# Altium PCB PCB1_21_02_dongho.PcbDoc
Units mil, origin at the board's own origin, x right, y up, seen from the top; angles counter-clockwise.
Board outline 1850 x 2600 mil, 2 copper layers (Top Layer, Bottom Layer); 6 components, 18 nets, 65 pads, 0 vias.
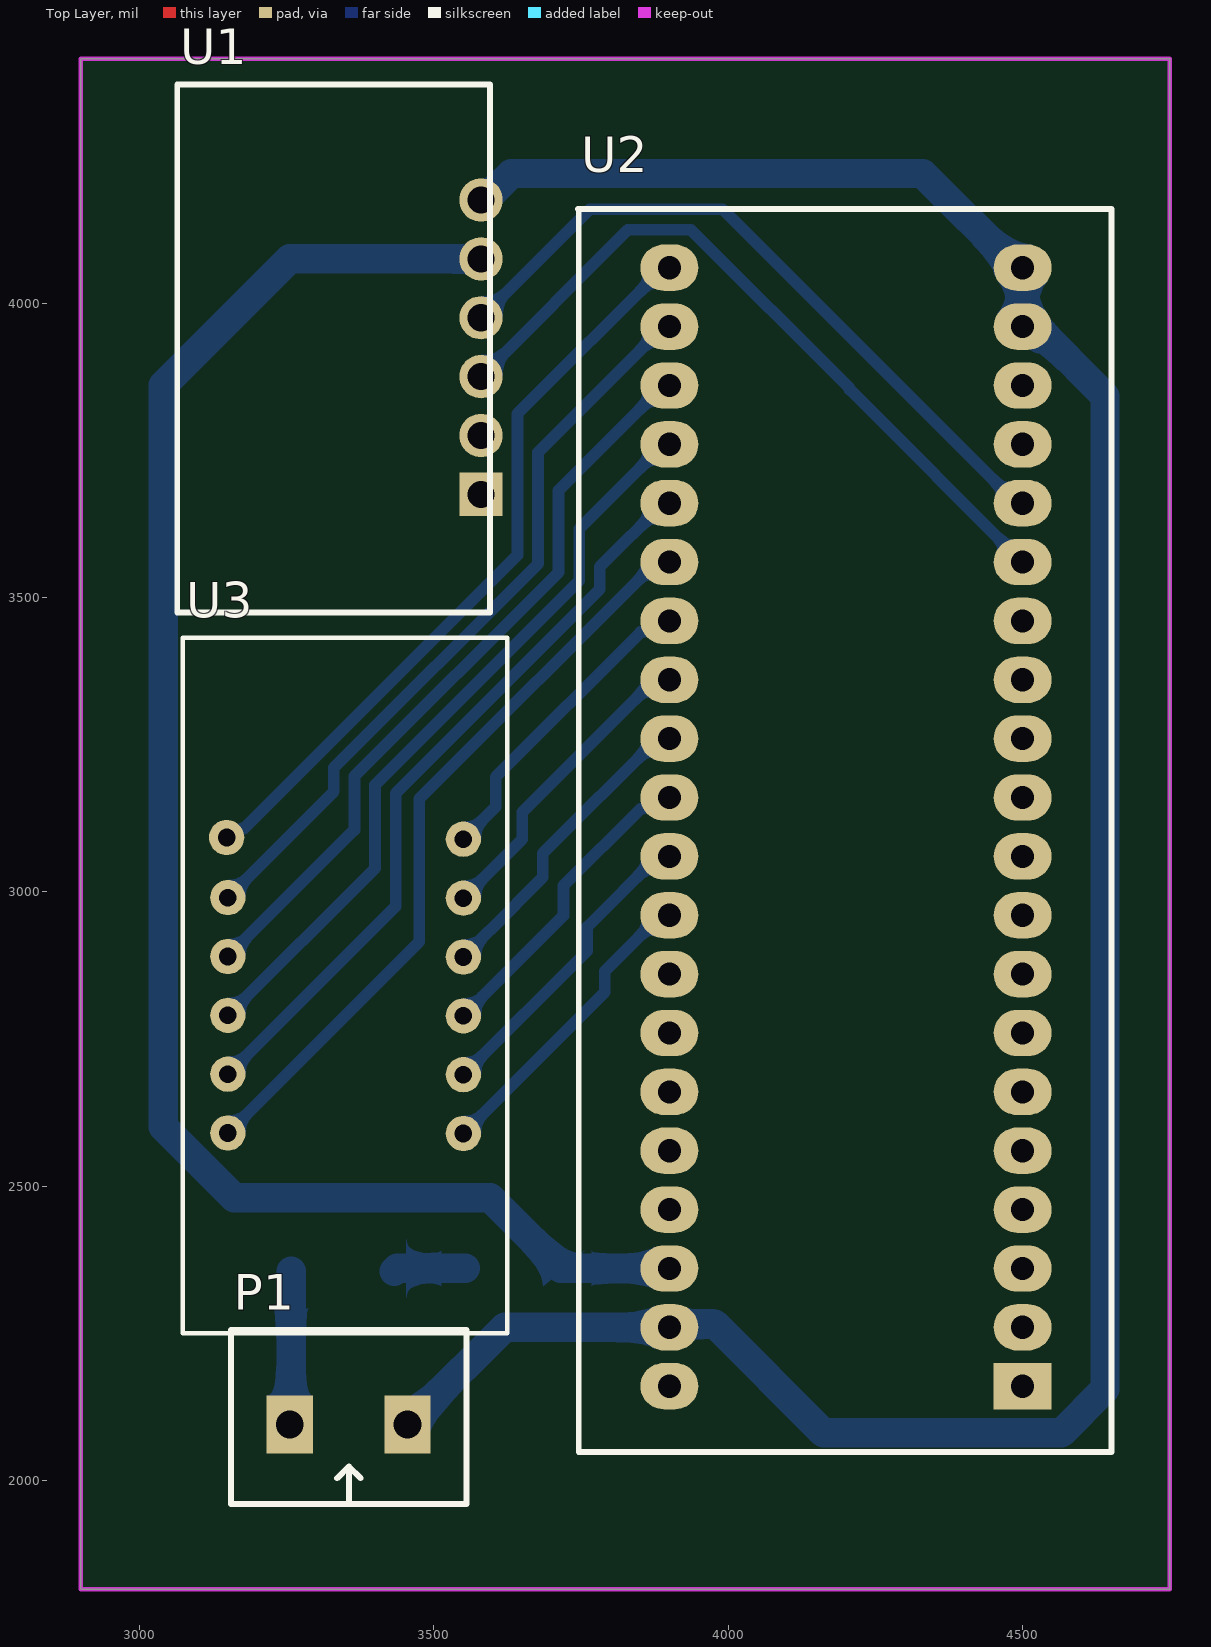
[diagram p0: Top Layer view]
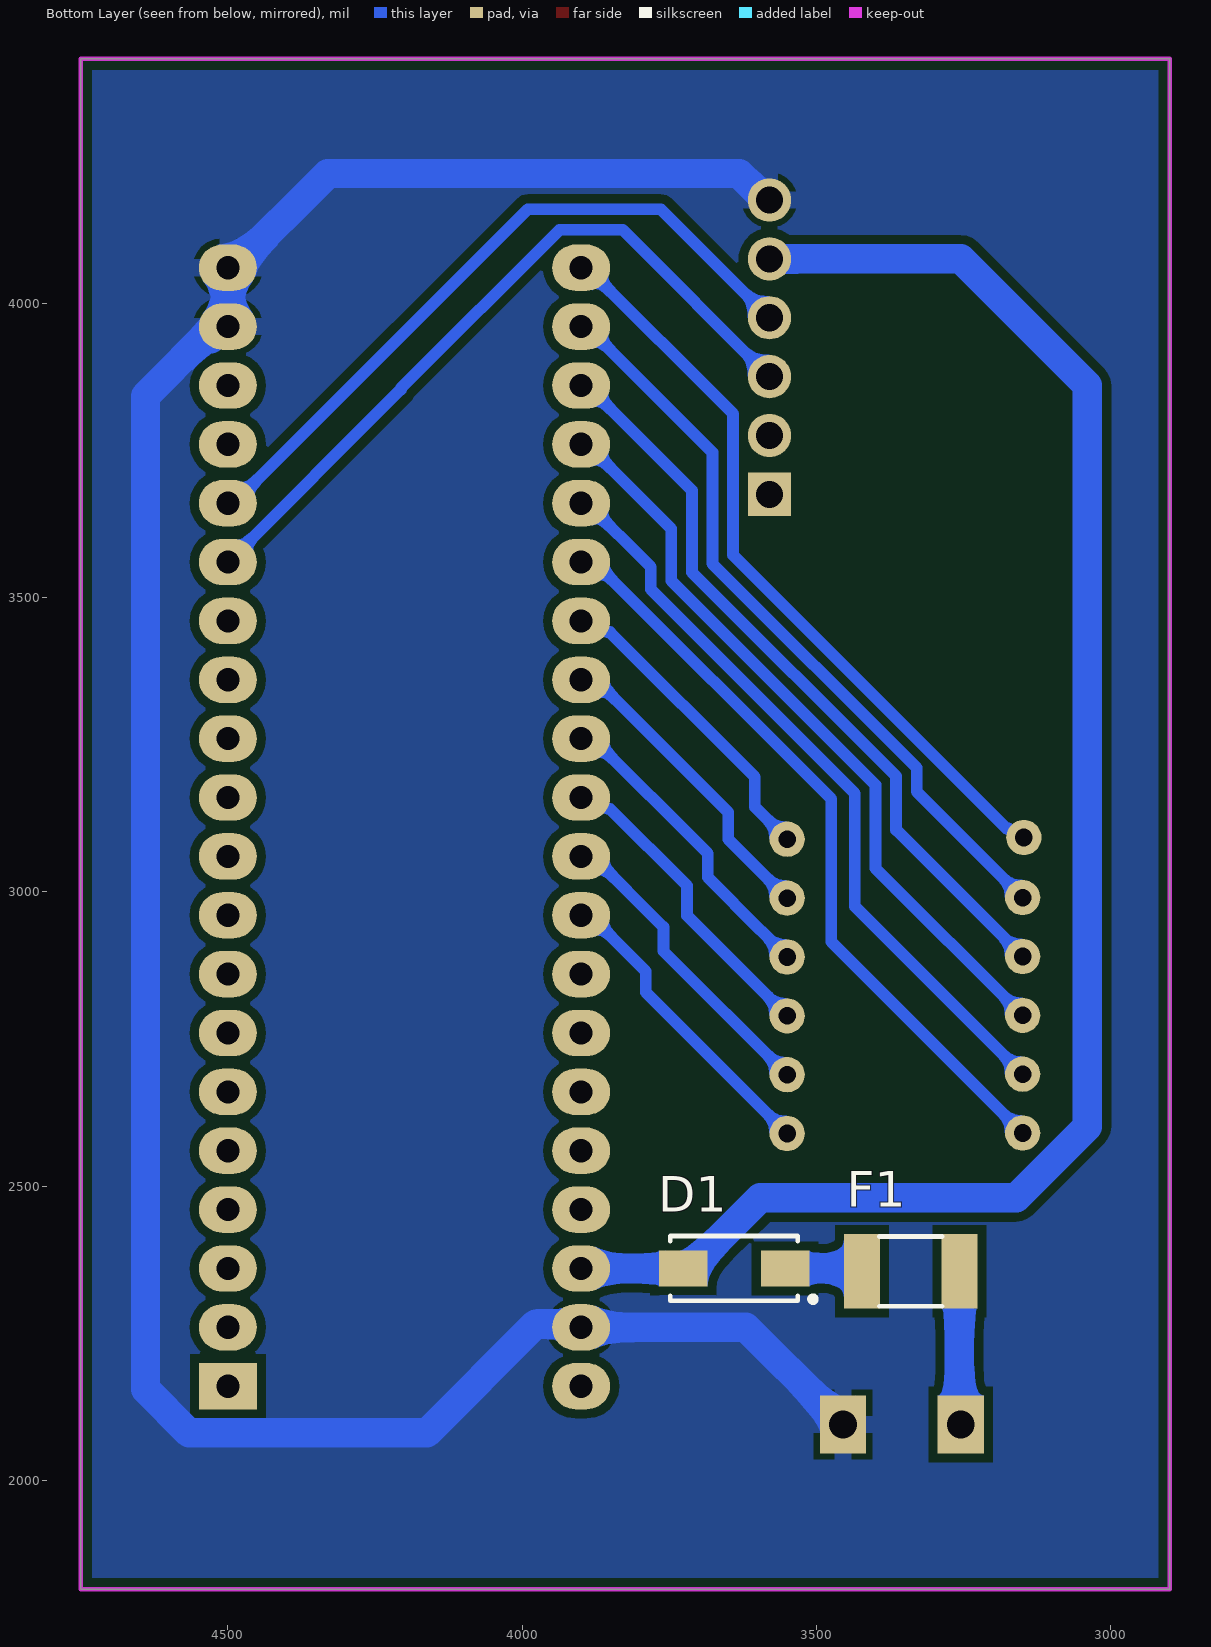
[diagram p1: Bottom Layer view, seen from below]
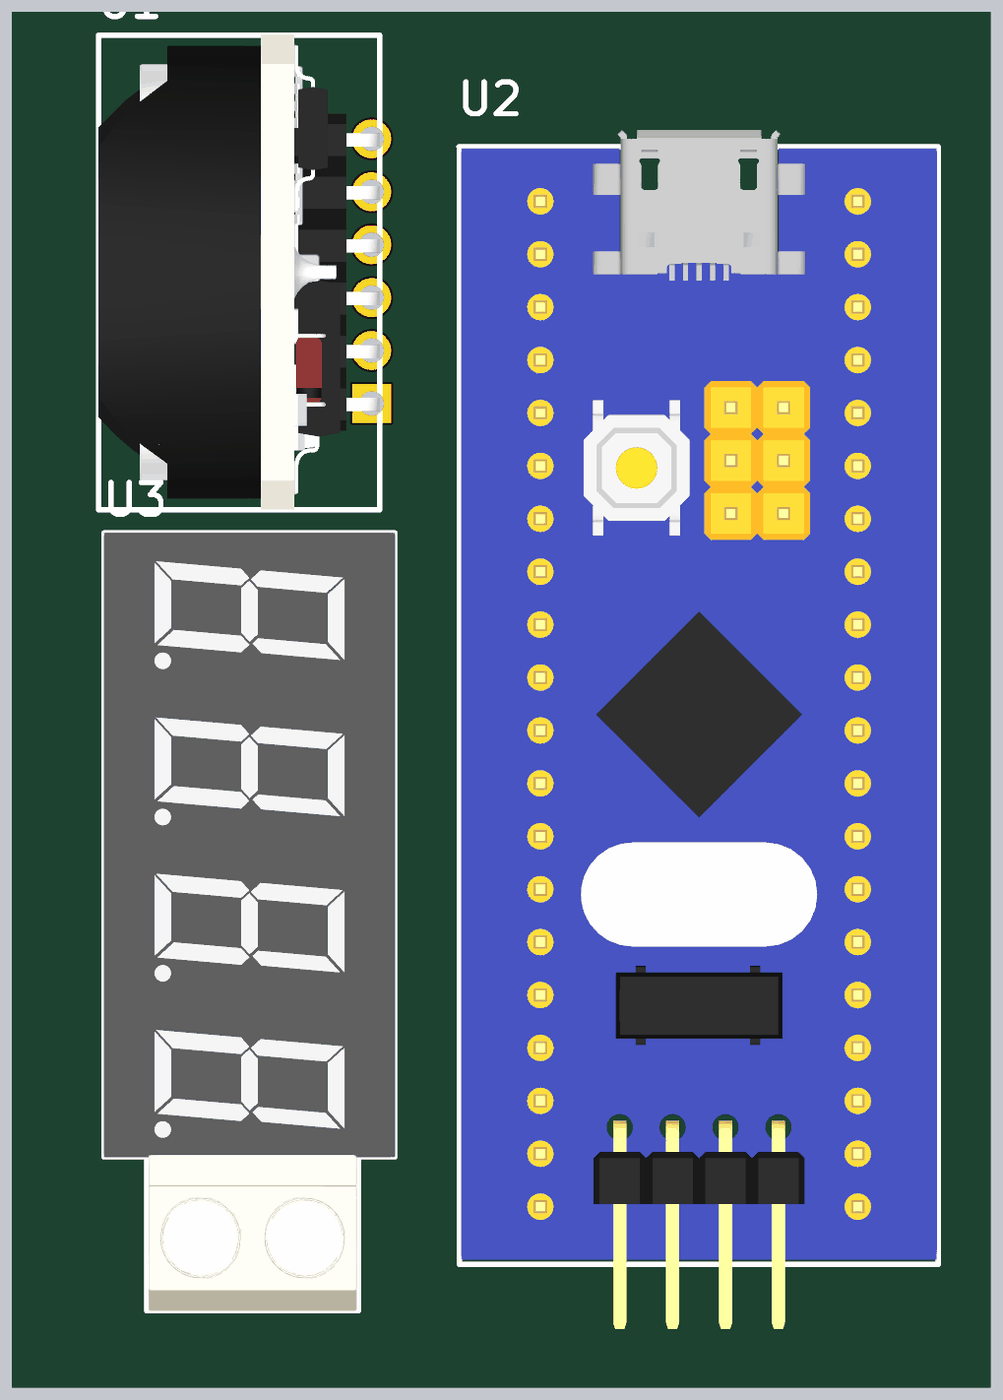
[diagram p2: 3D render of the assembled board from above, using the file's embedded part models]

## Layer stack, top to bottom
Top Solder: solder mask 0.4, Solder Resist, Dk 3.5
Top Layer: signal copper 1.4
Dielectric 1: dielectric 12.6, FR-4, Dk 4.8
Bottom Layer: signal copper 1.4
Bottom Solder: solder mask 0.4, Solder Resist, Dk 3.5

## Board outline
2900,1815 2900,4415 4750,4415 4750,1815

## Design rules (kind name [scope] priority, off if disabled: settings)
Clearance [All] p1: gap=15 ignorepadtopadclearanceinfootprint=FALSE except(0: Arc-Hole Track-Hole SMDPad-Hole THPad-Hole Via-Hole Fill-Hole Poly-Hole Region-Hole Text-Hole)
PolygonConnect [All] p1: connectstyle=Relief reliefconductorwidth=30 reliefentries=4 polygonreliefangle="90 Angle" airgapwidth=10
RoutingVias [All] p1: holewidth=31.5 width=59.06 viastyle="Through Hole" minholewidth=31.5 minwidth=59.06 maxholewidth=31.5 maxwidth=59.06
SolderMaskExpansion [All] p1: expansion=4 istentingtop=FALSE
Width [All] p1: maxlimit=50 minlimit=20 preferedwidth=30 minimp=50.000000 maximp=50.000000 favimp=50.000000
30 further rules are at their usual default settings.

## Components (designator, comment, footprint, x,y, rotation, side; value= is the part's Value field where it differs from the comment)
D1 "D Schottky" SS34 3640,2360 r0 bottom
F1 "Fuse" "FUSE SMD" 3340,2355 r0 bottom
P1 "Domino 2" "DOMINO 2- 5mm" 3355,2095 r180 top
U1 "Module DS3231" "Module DS3231( Part A )" 3694,3925 r90 top
U2 "Bluepill" "Blue Pill" 3900,2160 r0 top
U3 "4Digit 7Segment" "4 digit 7 segment" 3147.93,3092.2 r270 top

## Footprints (in the part's own frame and the unit in brackets; to place one, negate y for a bottom-side part, rotate by r counter-clockwise, add the part's x,y. Pads: shape width x height; smd on the part's side, far side on the other; paste and mask are expansions set on the pad)
"4 digit 7 segment" [mil]
  round 60 hole 30: 1(0,0) 2(102.2,2.07) 3(202.2,2.07) 4(302.2,2.07) 5(402.2,2.07) 6(502.2,2.07) 7(503.08,402.08) 8(403.08,402.08) 9(303.08,402.08) 10(203.08,402.08) 11(103.08,402.08) 12(3.08,402.08) 12(3.08,402.08)
  silkscreen extent -339,-75 842,477, body extent -339,-75 842,477, height 181
"Blue Pill" [mm]
  oval 2.5x2 hole 1: 1(0,48.26) 2(0,45.72) 3(0,43.18) 4(0,40.64) 5(0,38.1) 6(0,35.56) 7(0,33.02) 8(0,30.48) 9(0,27.94) 10(0,25.4) 11(0,22.86) 12(0,20.32) 13(0,17.78) 14(0,15.24) 15(0,12.7) 16(0,10.16) 17(0,7.62) 18(0,5.08) 19(0,2.54) 20(0,0) 22(15.24,2.54) 23(15.24,5.08) 24(15.24,7.62) 25(15.24,10.16) 26(15.24,12.7) 27(15.24,15.24) 28(15.24,17.78) 29(15.24,20.32) 30(15.24,22.86) 31(15.24,25.4) 32(15.24,27.94) 33(15.24,30.48) 34(15.24,33.02) 35(15.24,35.56) 36(15.24,38.1) 37(15.24,40.64) 38(15.24,43.18) 39(15.24,45.72) 40(15.24,48.26)
  rect 2.5x2 hole 1: 21(15.24,0)
  silkscreen extent -3.94,-2.84 19.08,50.8, body extent -3.84,-5.95 19.02,51.61, height 12.31
"DOMINO 2- 5mm" [mm]
  rect 2x2.5 hole 1.2: 1(-2.54,0) 2(2.54,0)
  silkscreen extent -5.08,-4.08 5.08,3.43, body extent -5,-4.07 5,3.43, height 10
"FUSE SMD" [mm] "SMD FUSE"
  rect 1.55x3.21 smd: 1(-2.1,0) 2(2.1,0)
  silkscreen extent -1.35,-1.5 1.35,1.51, body extent -2.37,-1.71 2.36,1.71, height 0.75
"Module DS3231( Part A )" [mm]
  rect 1.87x1.87 hole 1.17: 1(-6.35,2.896)
  round 1.87 hole 1.17: 2(-3.81,2.896) 3(-1.27,2.896) 4(1.27,2.896) 5(3.81,2.896) 6(6.35,2.896)
  silkscreen extent -11.46,2.51 11.33,16, body extent -11.45,2.49 11.35,16.02, height 38.3
SS34 [mm] "DO-214-AC/SMA Molded Diode, Body 5.3x2.6mm, IPC Medium Density"
  rect 2.1x1.55 smd: 1(-2.2,0) 2(2.2,0)
  silkscreen extent -3.52,-1.4 2.75,1.45, body extent -2.75,-1.42 2.75,1.38, height 2.3

## Part data
D1: "Schottky Diode", Code_JEDEC=DO-214-AA, LatestRevisionDate=17-Jul-2002, LatestRevisionNote="Re-released for DXP Platform.", PackageDescription="DO-214-AA/SMB; 2 C-Bend Leads; Body 5.3 x 3.6 mm, inc. leads (LxW)", PackageReference=SMB, Published=8-Jun-2000, Publisher="Altium Limited"
P1: "Domino, 2-Pin", LatestRevisionDate=17-Jul-2002, LatestRevisionNote="Re-released for DXP Platform.", Publisher="Altium Limited"
U1: library part DS3231, "The  DS3231  is  a  low-cost,  extremely  accurate  I2C  real-time clock (RTC) with an integrated temperature-compensated  crystal  oscillator  (TCXO)  and  crystal.", Manufacturer=N/A, Operating Voltage="3V3 - 5V5", ComponentLink1Description="Order link", ComponentLink1URL=https://www.thegioiic.com/ds3231-mach-thoi-gian-thuc-co-ic-nho-at24c32, ComponentLink2Description=Datasheet, ComponentLink2URL=https://pdf1.alldatasheet.com/datasheet-pdf/view/254832/MAXIM/DS3231.html, Interface Type=I2C, Module Dimensions="38 x 22 x 14 (LxWxH)"
U2: library part STM32F103C8T6, "STM32F103C8T6"
U3: "4 digit 7 segment ( Anot chung)"

## Nets (pads, with @x,y where several pads share a name; then routed paths per layer and width w, separated by ;. In a path a pad name is that pad's centre, name@x,y a point inside that pad or via, vN(x,y) a via of type N, cw(c..) or ccw(c..) an arc to the next point about the centre after c; other vN are vias at no path point)
5V: D1.2 U1.5 U2.18 | length 2854.9
  Bottom Layer w50: U1.5 3255,4075 3040,3860 3040,2601.01 3161.01,2480 3595.79,2480 3715.79,2360 D1.2 U2.18 U2.18@3895,2355
a: U2.8 U3.11 | length 530.5
  Bottom Layer w20: U3.11 3650,3089.1 3650,3135 3875,3360 U2.8
b: U2.12 U3.7 | length 524.6
  Bottom Layer w20: U3.7 3790,2829.1 3790,2865 3885,2960 U2.12
c: U2.4 U3.4 | length 1286.4
  Bottom Layer w20: U3.4 3400,3040 3400,3181.51 3746.81,3528.32 3746.81,3616.65 3890.16,3760 U2.4
d: U2.2 U3.2 | length 1286.4
  Bottom Layer w20: U3.2 3330,3170 3330,3210.5 3676.81,3557.31 3676.81,3696.15 3676.81,3746.65 3890.16,3960 U2.2
demical: U2.3 U3.3 | length 1286.4
  Bottom Layer w20: U3.3 3365,3105 3365,3196.01 3711.81,3542.82 3711.81,3681.65 3890.16,3860 U2.3
dig1: U2.7 U3.12 | length 533.4
  Bottom Layer w20: U3.12@3550.01,3089.12 3605,3144.1 3605,3195 3851.03,3441.03 3855.29,3441.03 3874.26,3460 U2.7
dig2: U2.10 U3.9 | length 533.4
  Bottom Layer w20: U3.9 3720,2959.1 3720,3010 3851.03,3141.03 3855.29,3141.03 3874.26,3160 U2.10
dig3: U2.11 U3.8 | length 527.6
  Bottom Layer w20: U3.8 3760,2899.1 3760,2940 3880,3060 U2.11
dig4: U2.6 U3.6 | length 1293.8
  Bottom Layer w20: U3.6 3475,2915 3475,3157.51 3877.49,3560 U2.6
e: U2.1 U3.1 | length 1293.4
  Bottom Layer w20: U3.1 3158.75,3092.2 3174.05,3107.49 3177.49,3107.49 3641.81,3571.81 3641.81,3710.65 3641.81,3811.65 3890.16,4060 U2.1
f: U2.9 U3.10 | length 527.6
  Bottom Layer w20: U3.10 3639.82,2978.92 3639.82,2979.32 3685,3024.5 3685,3065 3880,3260 U2.9
g: U2.5 U3.5 | length 1286.4
  Bottom Layer w20: U3.5 3435,2975 3435,3167.01 3781.81,3513.82 3781.81,3551.65 3890.16,3660 U2.5
GND: P1.1 U1.6 U2.19 U2.39 U2.40 | length 4344.6
  Bottom Layer w50: P1.1 3455,2104.84 3469.37,2119.21 3479.21,2119.21 3620,2260 U2.19 3905.49,2265.49 3977.08,2265.49 4161.95,2080.63 4565.78,2080.63 4640,2154.85 4640,3842.09 4542.72,3939.37 4529.29,3939.37 4500,3968.66 U2.40 4490.16,4060 4330.16,4220 3631.39,4220 3586.39,4175 U1.6
NetD1_1: D1.1 F1.2 | length 122.8
  Bottom Layer w50: F1.2@3432.68,2355 3437.68,2360 D1.1
NetF1_1: F1.1 P1.2 | length 257.7
  Bottom Layer w50: P1.2@3257.32,2097.32 F1.1
NetU1_3: U1.3 U2.35 | length 1258.1
  Bottom Layer w20: U1.3 3829.37,4124.37 3936.51,4124.37 4205.98,3854.9 4205.98,3853.14 4499.12,3560 U2.35
NetU1_4: U1.4 U2.36 | length 1203.2
  Bottom Layer w20: U1.4 3764.37,4159.37 3990.79,4159.37 4490.16,3660 U2.36
pads on no net: U1.1 U1.2 U2.13 U2.14 U2.15 U2.16 U2.17 U2.20 U2.21 U2.22 U2.23 U2.24 U2.25 U2.26 U2.27 U2.28 U2.29 U2.30 U2.31 U2.32 U2.33 U2.34 U2.37 U2.38
copper on no net: | length 5
  Bottom Layer w20: 4495,2160 4500,2160

## Polygon pours and split planes (outlines as drawn)
GND on Bottom Layer "GND_L02_P000" (solid, remove dead copper, pour order 0): 2900,1815 2900,4415 4750,4415 4750,1815

## Keep-outs
Keep-Out Layer:
  the board outline again, w7.87